# Altium PCB DPPXHK.PcbDoc (part 1 of 3)
Units mm, origin at the board's own origin, x right, y up, seen from the top; angles counter-clockwise.
Board outline 90 x 49 mm, 4 copper layers (Top Layer, ground_plane, source, Bottom Layer), stack 0.778 mm thick; 169 components, 237 nets, 996 pads, 341 vias.
Unrouted connection lines stored in the file: 220.
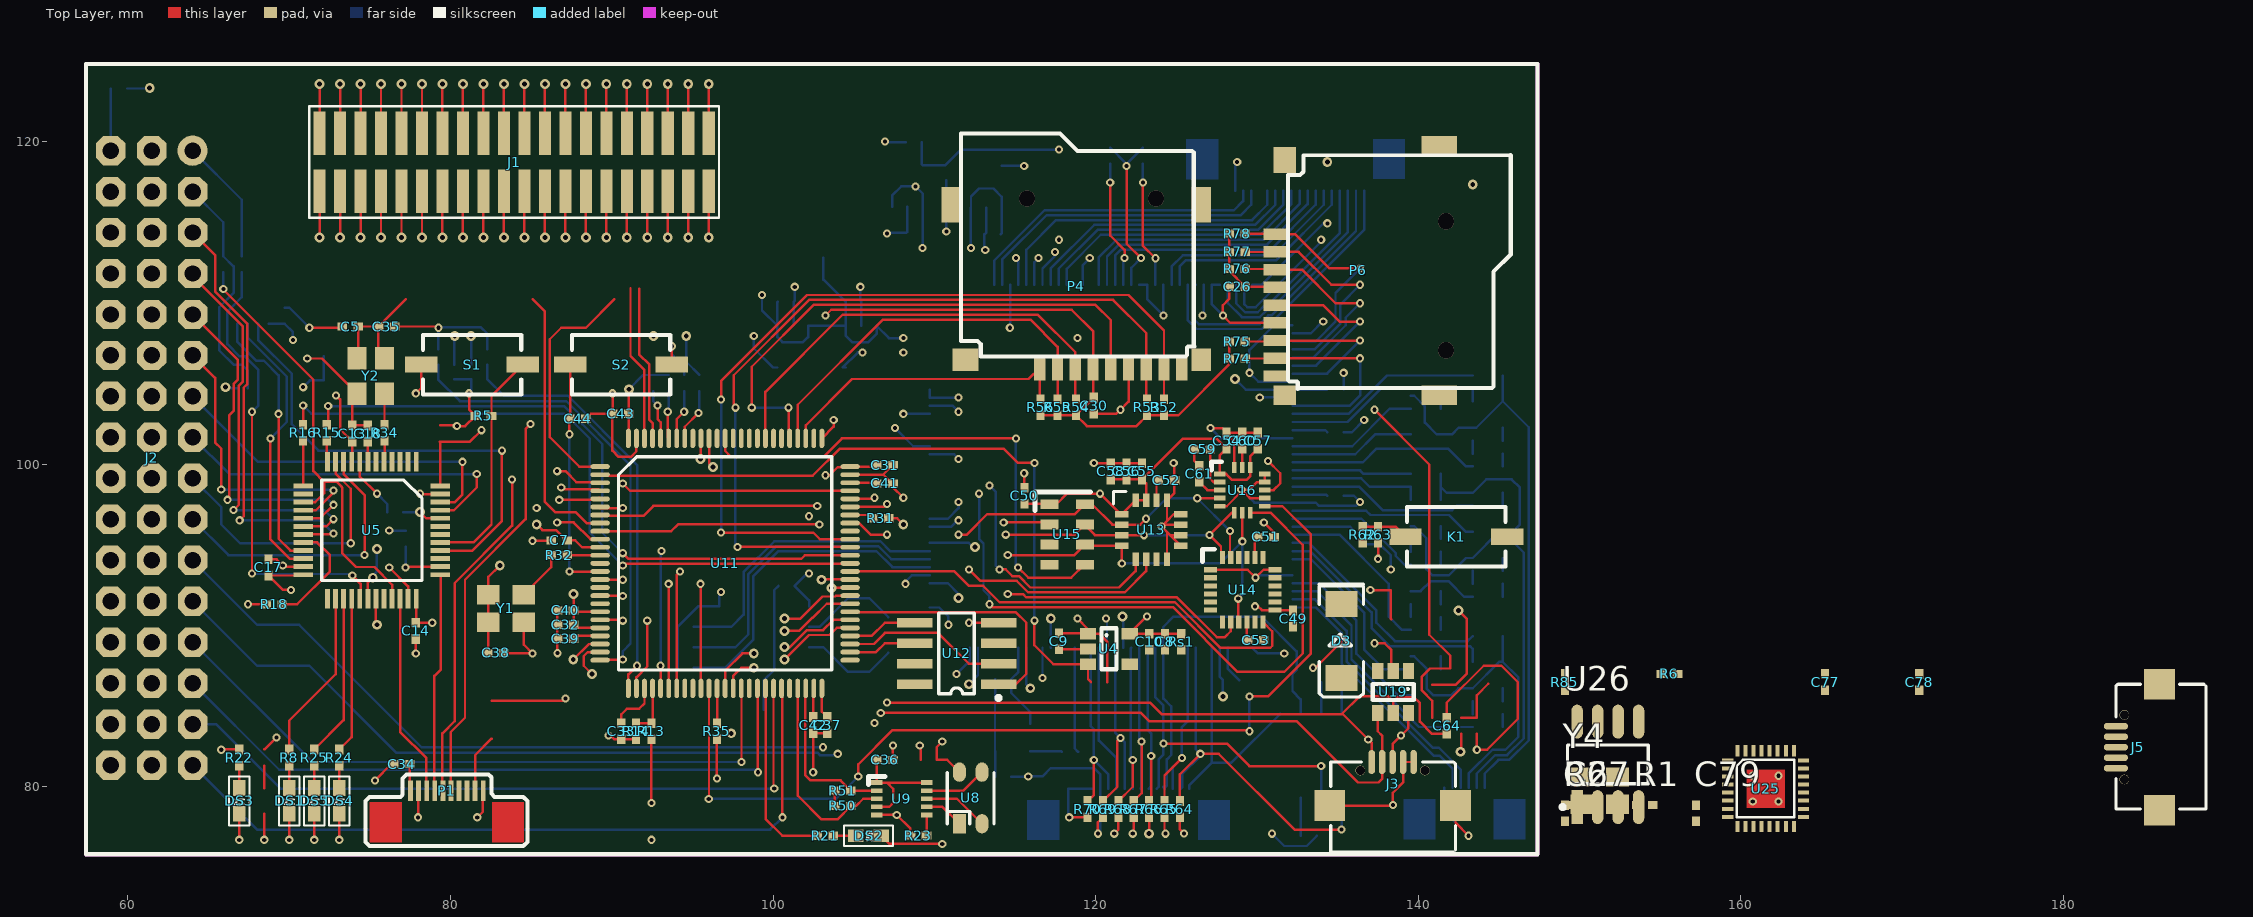
[diagram p0: Top Layer view]
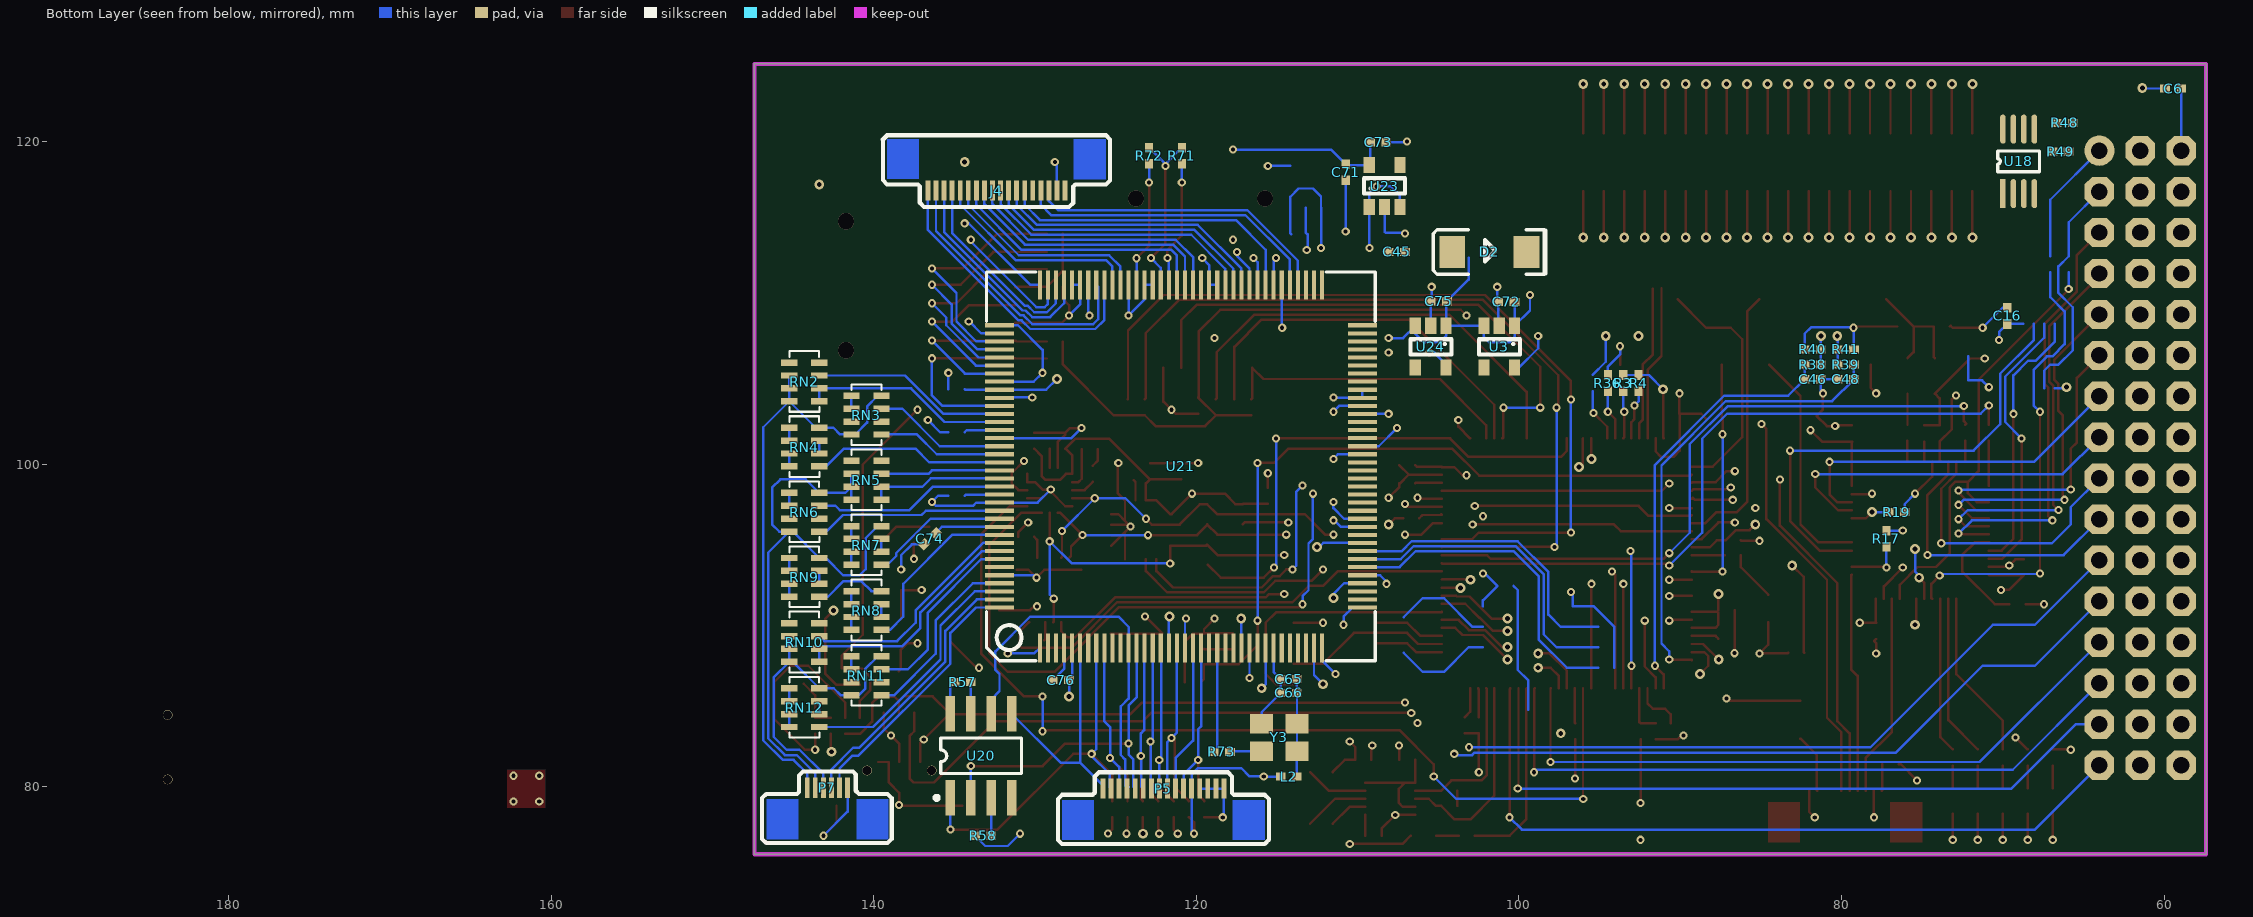
[diagram p1: Bottom Layer view, seen from below]
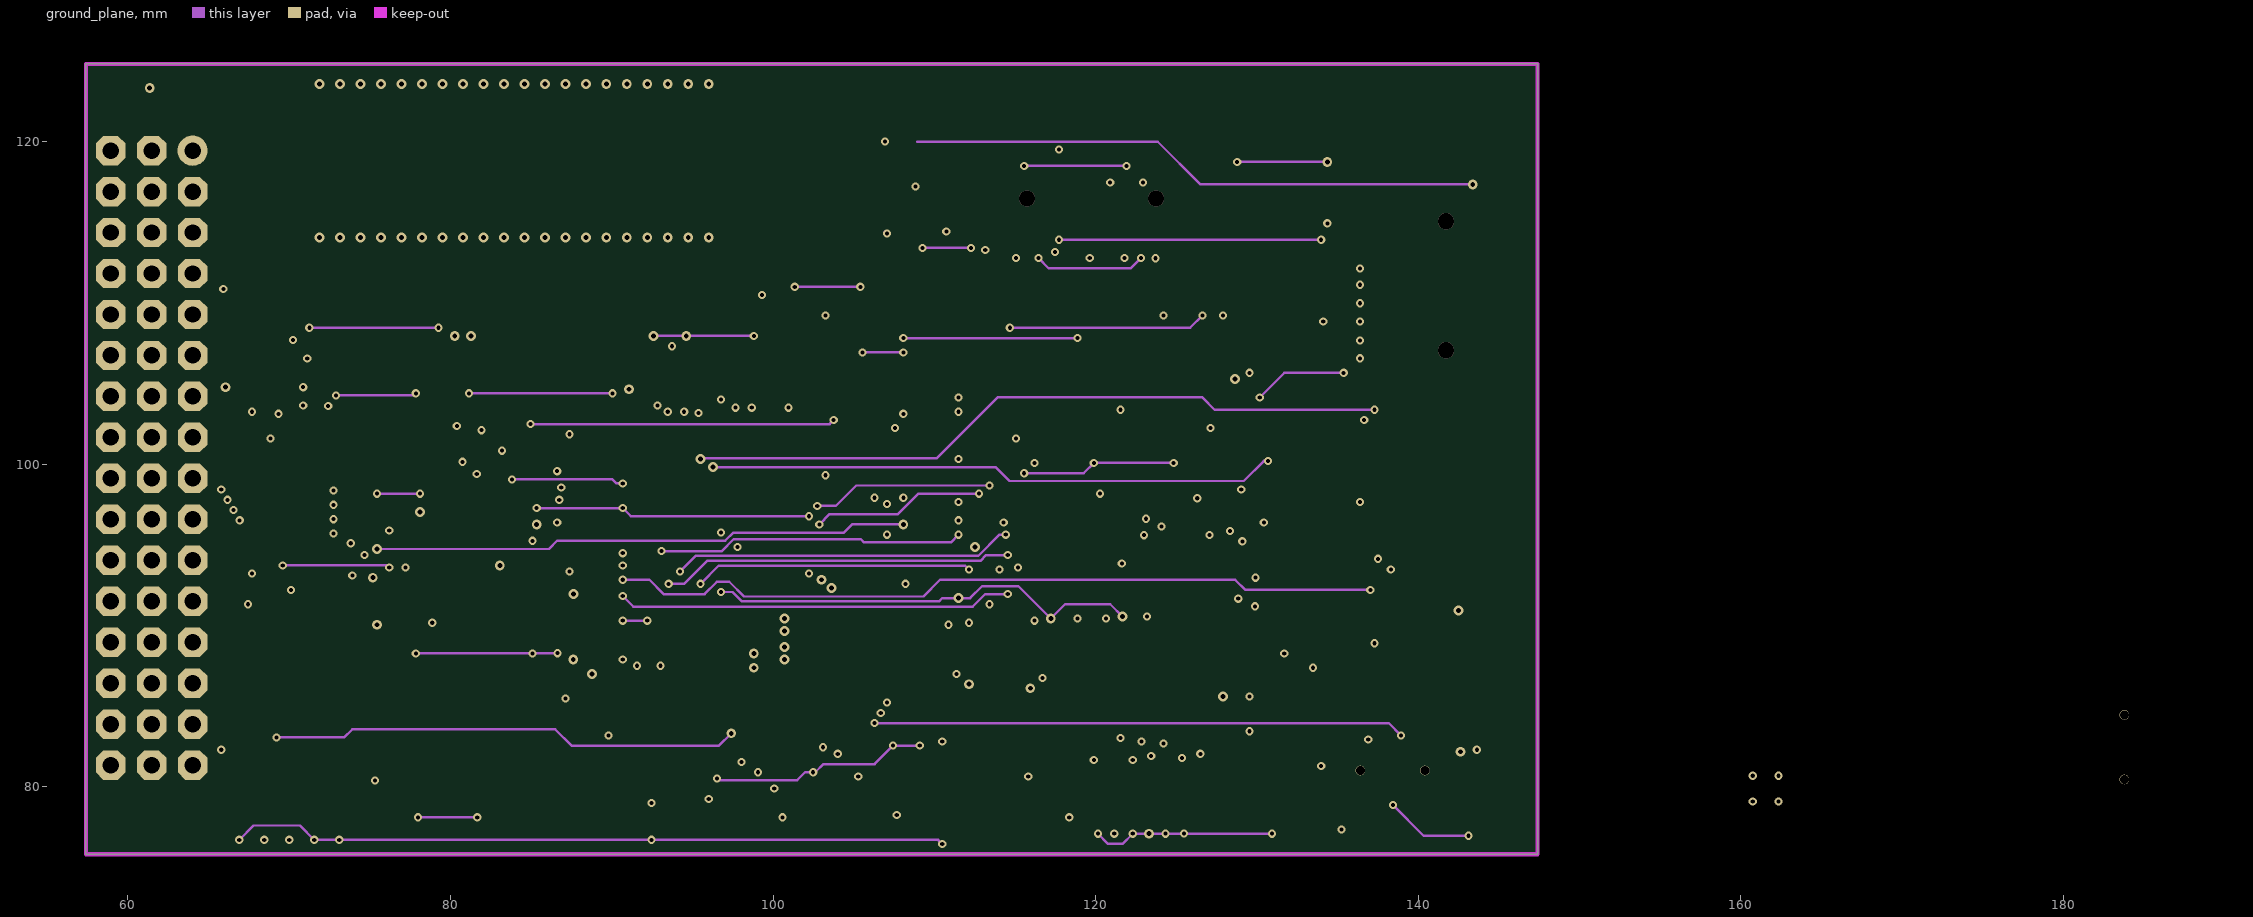
[diagram p2: ground_plane]
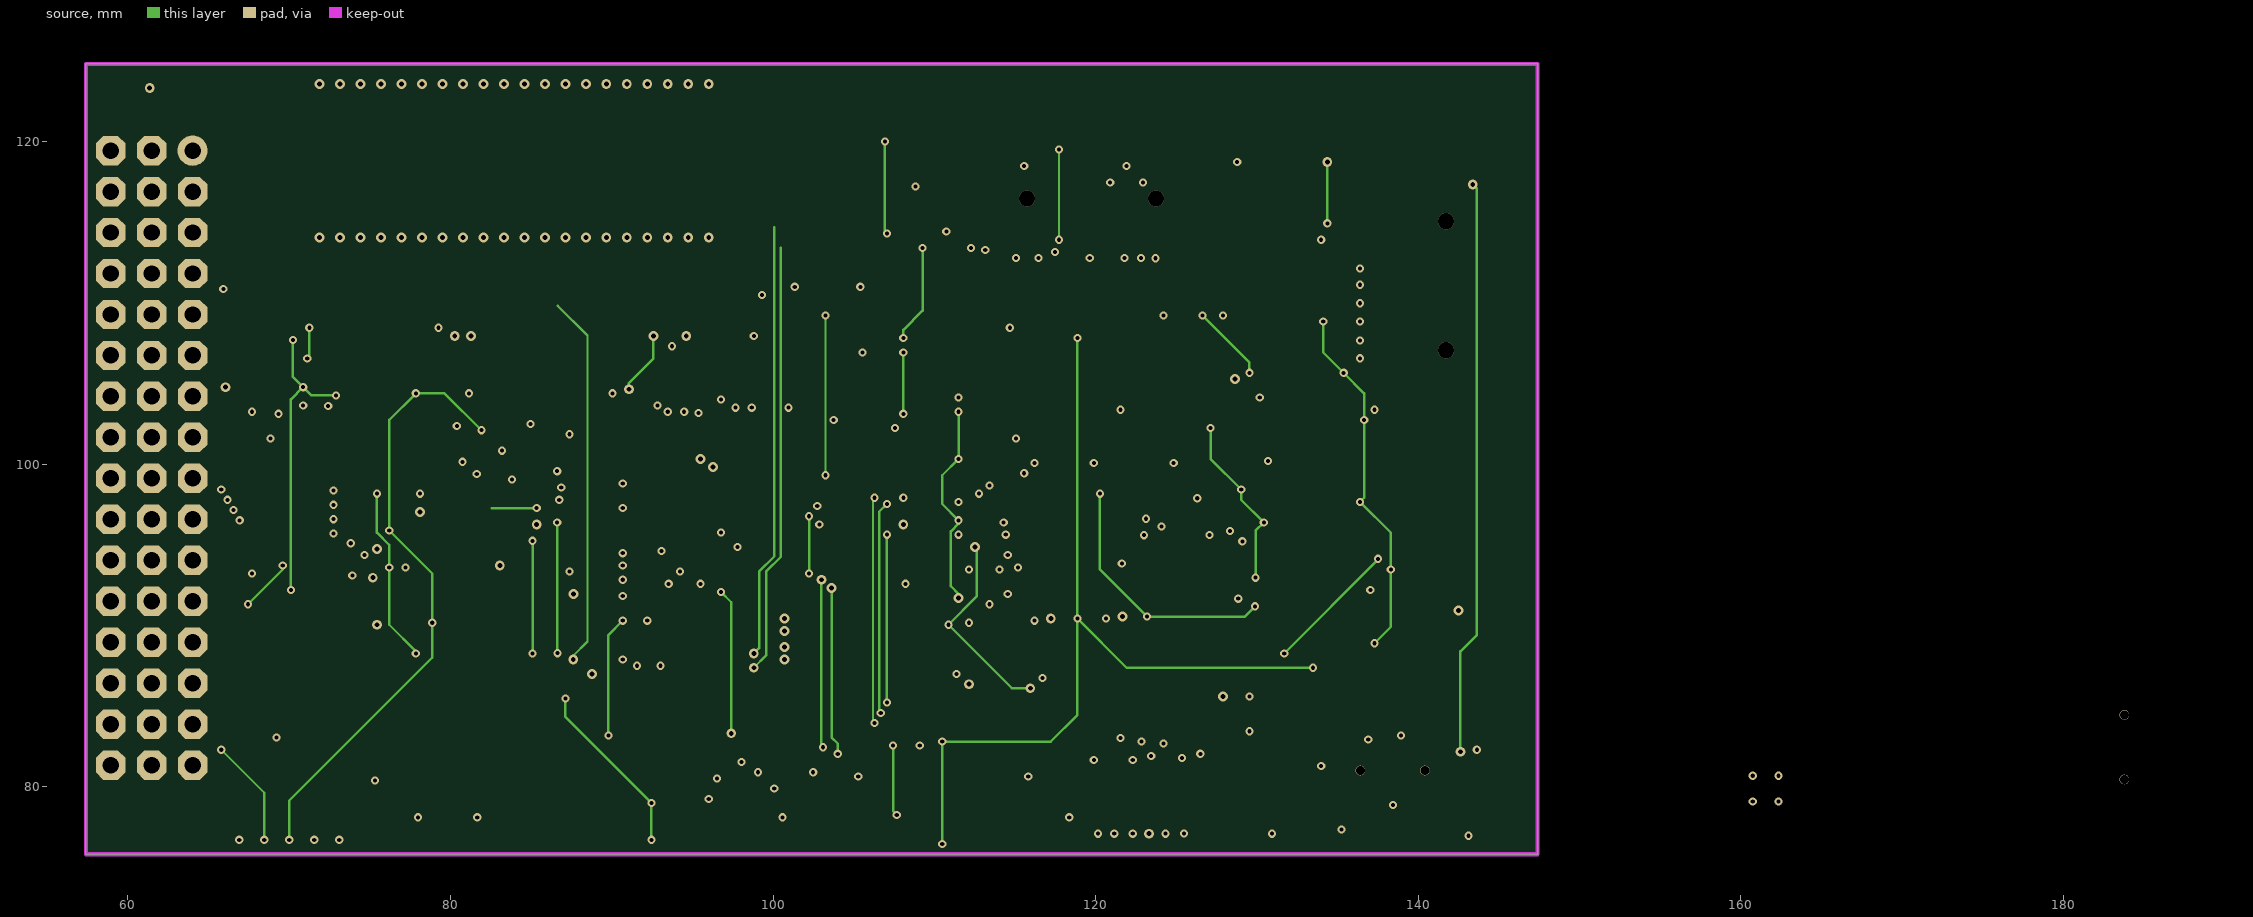
[diagram p3: source]

## Layer stack, top to bottom
Top Solder: solder mask 0.0102, Solder Resist, Dk 3.5
Top Layer: signal copper 0.0356
Dielectric 1: core 0.254, FR-4, Dk 4.2
ground_plane: signal copper 0.036
Dielectric 3: prepreg 0.127, Dk 4.2
source: signal copper 0.036
Dielectric 2: core 0.254, Dk 4.2
Bottom Layer: signal copper 0.0356
Bottom Solder: solder mask 0.0102, Solder Resist, Dk 3.5

## Board outline
57.399,75.814 147.399,75.814 147.399,124.814 57.399,124.814

## Design rules (kind name [scope] priority, off if disabled: settings)
Clearance [All] p1: gap=0.152 ignorepadtopadclearanceinfootprint=FALSE
ComponentClearance [All] p1: gap=0.152 collisioncheckmode=3 verticalgap=0.152 showdistances=FALSE
DiffPairsRouting [All] p1: maxlimit=0.254 minlimit=0.254 mostfreqgap=0.254 toplayer_minwidth=0.381 toplayer_maxwidth=0.381 toplayer_prefwidth=0.381 midlayer1_minwidth=0.381 midlayer1_maxwidth=0.381 midlayer1_prefwidth=0.381 midlayer2_minwidth=0.381 midlayer2_maxwidth=0.381 midlayer2_prefwidth=0.381 bottomlayer_minwidth=0.381 bottomlayer_maxwidth=0.381 bottomlayer_prefwidth=0.381 maxuncoupledlength=12.7
HoleSize [All] p1: absolutevalues=TRUE maxlimit=0.356 minlimit=0.305 maxpercent=80.000 minpercent=20.000
PolygonConnect [All] p1: connectstyle=Relief reliefconductorwidth=0.254 reliefentries=4 polygonreliefangle="90 Angle" airgapwidth=0.254
RoomDefinition DPPXHK_USB_SD_DEBUG [InComponentClass('DPPXHK_USB_SD_DEBUG')] p1: confinementstyle=ConfineIn formatcopy=TRUE lockcomponents=FALSE outline 0,0 50.8,0 50.8,25.4 0,25.4
RoomDefinition DPPXHK_SERVO [InComponentClass('DPPXHK_SERVO')] p2: confinementstyle=ConfineIn formatcopy=TRUE lockcomponents=FALSE outline 0,0 50.8,0 50.8,25.4 0,25.4
RoomDefinition DPPXHK_SENSOR [InComponentClass('DPPXHK_SENSOR')] p3: confinementstyle=ConfineIn formatcopy=TRUE lockcomponents=FALSE outline 0,0 50.8,0 50.8,25.4 0,25.4
RoomDefinition DPPXHK_POWER_SOURCE [InComponentClass('DPPXHK_POWER_SOURCE')] p4: confinementstyle=ConfineIn formatcopy=TRUE lockcomponents=FALSE outline 0,0 50.8,0 50.8,25.4 0,25.4
RoomDefinition DPPXHK_MCU [InComponentClass('DPPXHK_MCU')] p5: confinementstyle=ConfineIn formatcopy=TRUE lockcomponents=FALSE outline 0,0 50.8,0 50.8,25.4 0,25.4
RoomDefinition DPPXHK_LEDs [InComponentClass('DPPXHK_LEDs')] p6: confinementstyle=ConfineIn formatcopy=TRUE lockcomponents=FALSE outline 0,0 50.8,0 50.8,25.4 0,25.4
RoomDefinition DPPXHK_IO [InComponentClass('DPPXHK_IO')] p7: confinementstyle=ConfineIn formatcopy=TRUE lockcomponents=FALSE outline 0,0 50.8,0 50.8,25.4 0,25.4
RoomDefinition DPPXHK_FMUPOWER [InComponentClass('DPPXHK_FMUPOWER')] p8: confinementstyle=ConfineIn formatcopy=TRUE lockcomponents=FALSE outline 0,0 50.8,0 50.8,25.4 0,25.4
RoomDefinition DPPXHK_FMU_PORTS_CAN [InComponentClass('DPPXHK_FMU_PORTS_CAN')] p9: confinementstyle=ConfineIn formatcopy=TRUE lockcomponents=FALSE outline 0,0 50.8,0 50.8,25.4 0,25.4
RoomDefinition DPPXHK_10CL010_SDRAM [InComponentClass('DPPXHK_10CL010_SDRAM')] p10: confinementstyle=ConfineIn formatcopy=TRUE lockcomponents=FALSE outline 0,0 50.8,0 50.8,25.4 0,25.4
RoomDefinition DPPXHK_10CL010_POWER [InComponentClass('DPPXHK_10CL010_POWER')] p11: confinementstyle=ConfineIn formatcopy=TRUE lockcomponents=FALSE outline 0,0 50.8,0 50.8,25.4 0,25.4
RoomDefinition DPPXHK_10CL010_GRAPHICS [InComponentClass('DPPXHK_10CL010_GRAPHICS')] p12: confinementstyle=ConfineIn formatcopy=TRUE lockcomponents=FALSE outline 0,0 50.8,0 50.8,25.4 0,25.4
RoomDefinition DPPXHK_10CL010_FPGA [InComponentClass('DPPXHK_10CL010_FPGA')] p13: confinementstyle=ConfineIn formatcopy=TRUE lockcomponents=FALSE outline 0,0 50.8,0 50.8,25.4 0,25.4
RoomDefinition DPPXHK_10CL010_DEBUGPORT [InComponentClass('DPPXHK_10CL010_DEBUGPORT')] p14: confinementstyle=ConfineIn formatcopy=TRUE lockcomponents=FALSE outline 0,0 50.8,0 50.8,25.4 0,25.4
RoutingVias [All] p1: holewidth=0.305 width=0.61 viastyle="Through Hole" minholewidth=0.305 minwidth=0.61 maxholewidth=0.305 maxwidth=0.61
SolderMaskExpansion [All] p1: expansion=0.102
Width [All] p1: maxlimit=0.254 minlimit=0.152 preferedwidth=0.152
27 further rules are at their usual default settings.

## Classes and differential pairs
net class VGAD[15..0]: VGAD0 VGAD1 VGAD2 VGAD3 VGAD4 VGAD5 VGAD6 VGAD7 VGAD8 VGAD9 VGAD10 VGAD11 VGAD12 VGAD13 VGAD14 VGAD15
component class DPPXHK_10CL010_SDRAM: C77 C78 C79 J5 R1 R2 R6 R85 U25 U26 U27 Y4
component class DPPXHK_10CL010_DEBUGPORT: K1 P5 P7 R57 R58 R62 R63 U20
component class DPPXHK_FMU_PORTS_CAN: J1 P1 R3 R4 R5
component class DPPXHK_FMUPOWER: C5 C6 C7 C8 C9 C10 F7 F8 R13 R14 U3 U4
component class DPPXHK_IO: C13 C14 C16 C17 C18 R15 R16 R17 R18 R19 U5
component class DPPXHK_LEDs: C26 DS1 DS2 DS3 DS4 DS5 R8 R21 R22 R23 R24 R25 S1 U8 U9
component class DPPXHK_MCU: C30 C31 C32 C33 C34 C35 C36 C37 C38 C39 C40 C41 C42 C43 C44 R31 R32 R34 R35 R36 S2 U11 U12 Y1 Y2
component class DPPXHK_POWER_SOURCE: C45 C46 C48 D2 D3 Q8 Q9 R38 R39 R40 R41
component class DPPXHK_SENSOR: C49 C50 C51 C52 C53 C54 C55 C56 C57 C58 C59 C60 C61 Rs1 U13 U14 U15 U16
component class DPPXHK_SERVO: J2 R48 R49 U18
component class DPPXHK_USB_SD_DEBUG: C64 J3 P4 R50 R51 R52 R53 R54 R55 R56 U19
component class DPPXHK_10CL010_POWER: C67 C71 C72 C73 C74 C75 C76 U23 U24
component class DPPXHK_10CL010_FPGA: C65 C66 L2 R64 R65 R66 R67 R68 R69 R70 R71 R72 R73 U21 Y3
component class DPPXHK_10CL010_GRAPHICS: J4 P6 R74 R75 R76 R77 R78 RN2 RN3 RN4 RN5 RN6 RN7 RN8 RN9 RN10 RN11 RN12
differential pair USB: +USB_P -USB_N

## Components (designator, comment, footprint, x,y, rotation, side; value= is the part's Value field where it differs from the comment)
C5 "106 16V" LC0402 73.787,108.537 r180 top
C6 "104" LC0402 59.444,123.294 r0 bottom
C7 "104" LC0402 86.741,95.27 r0 top
C8 "106 16V" LC0402 124.298,88.987 r270 top
C9 "104" LC0402 117.729,89.027 r90 top
C10 "104" LC0402 123.33,88.987 r90 top
C13 "104" LC0402 73.914,101.903 r90 top
C14 "104" LC0402 77.851,89.662 r270 top
C16 "104" LC0402 69.723,109.198 r90 bottom
C17 "106 10V" LC0402 68.707,93.599 r90 top
C18 "104" LC0402 74.867,101.903 r270 top
C26 "104" LC0402 128.778,110.998 r0 top
C30 "104" LC0402 119.888,103.632 r270 top
C31 "104" LC0402 106.934,99.949 r0 top
C32 "104" LC0402 87.13,90.043 r180 top
C33 "104" LC0402 90.594,83.439 r270 top
C34 "104" LC0402 76.962,81.408 r180 top
C35 "106 10V" LC0402 76.031,108.537 r0 top
C36 "106 10V" LC0402 106.934,81.661 r0 top
C37 "104" LC0402 103.355,83.82 r90 top value=0.1uF
C38 "105" LC0402 82.804,88.3 r180 top
C39 "106 10V" LC0402 87.13,89.177 r0 top
C40 "104" LC0402 87.13,90.932 r0 top
C41 "2.2uF" LC0402 106.934,98.806 r0 top
C42 "2.2uF" LC0402 102.489,83.82 r270 top
C43 "104" LC0402 90.551,103.124 r0 top
C44 "104" LC0402 87.884,102.811 r180 top
C45 "106 16v" LC0402 107.569,113.157 r180 bottom
C46 "104" LC0402 81.788,105.263 r0 bottom
C48 "104" LC0402 79.727,105.263 r180 bottom
C49 "104" LC0402 132.239,90.432 r90 top
C50 "10uF 10V" LC0402 115.588,98.044 r270 top
C51 "10n" LC0402 130.556,95.487 r180 top
C52 "10n" LC0402 124.387,99.011 r180 top
C53 "2.2uF" LC0402 129.921,89.094 r180 top
C54 "104" LC0402 128.122,101.461 r270 top
C55 "2.2uF" LC0402 122.875,99.556 r270 top
C56 "104" LC0402 121.907,99.556 r270 top
C57 "104" LC0402 130.056,101.461 r270 top
C58 "10u 10V" LC0402 120.94,99.556 r270 top
C59 "105" LC0402 126.609,100.916 r0 top
C60 "10u 10V" LC0402 129.089,101.461 r270 top
C61 "105" LC0402 126.423,99.404 r90 top
C64 "106 16v" LC0402 141.774,83.779 r90 top
C65 "104" LC0402 114.268,86.679 r180 bottom value=0.1uF
C66 "105" LC0402 114.268,85.813 r180 bottom value=4.7uf
C67 "106 16V" LC0402 149.098,78.359 r90 top
C71 "106 16V" LC0402 110.744,118.102 r270 bottom
C72 "104" LC0402 100.777,110.059 r180 bottom
C73 "104" LC0402 108.725,119.967 r0 bottom
C74 "106 16V" LC0402 136.525,95.377 r315 bottom
C75 "104" LC0402 104.963,110.109 r180 bottom
C76 "104" LC0402 128.397,86.614 r180 bottom
C77 "104" LC0402 165.227,86.487 r90 top value=0.1uF
C78 "105" LC0402 171.069,86.487 r90 top
C79 "106 16v" LC0402 157.226,78.359 r90 top
D2 "1N5822" SMA 104.14,113.157 r0 bottom
D3 "1N5822" SMA 135.242,86.738 r270 top locked
DS1 "LED3" 0603_diode 70.003,79.121 r90 top
DS2 "AMBER LED" 0603_diode 105.918,76.962 r180 top
DS3 "GREEN LED" 0603_diode 66.903,79.121 r90 top
DS4 "AMBER LED" 0603_diode 73.102,79.121 r90 top
DS5 "BLUE LED" 0603_diode 71.552,79.121 r90 top
J1 "36pin" SMD-HEADER-2X20 71.882,116.923 r0 top
J2 "HEADER-3*16" 3X16RA 61.468,100.393 r180 top locked
J3 "440247-1" MCRO_USB 137.115,81.534 r0 top locked
J4 "CAMERA" FPC-0.5-18 128.144,116.967 r0 bottom locked
J5 "440247-1" MCRO_USB 183.261,81.153 r90 top
K1 "RESET" BUTTON-3*6 142.367,95.504 r0 top
L2 "10K" 0402R 114.268,80.626 r0 bottom value=600ohm
P1 "FMU/IO_SW" FPC-0.5-10 77.526,79.756 r0 top
P4 "TF card" TF-2 118.791,111.028 r90 top locked
P5 "DEBUG_FPC" FPC-0.5-16 125.793,79.883 r180 bottom locked
P6 "TF card" TF-2 136.271,112.014 r0 top locked
P7 "VGA_PORT" FPC-0.5-6 144.129,79.935 r180 bottom locked
R1 "10K" 0402R 154.051,78.867 r0 top value=820
R2 "10K" 0402R 149.733,78.867 r0 top value=22
R3 "2k" 0402R 93.532,105.029 r270 bottom
R4 "2k" 0402R 92.58,105.029 r270 bottom
R5 "2k" 0402R 82.042,102.997 r0 top
R6 "10K" 0402R 155.575,86.995 r0 top value=12K
R8 "500R" 0402R 70.003,81.811 r270 top
R13 "10k" 0402R 92.456,83.439 r90 top
R14 "10k" 0402R 91.503,83.439 r270 top
R15 "220" 0402R 72.327,101.951 r90 top
R16 "220" 0402R 70.866,101.951 r90 top
R17 "10k" 0402R 77.216,95.377 r90 bottom
R18 "10k" 0402R 69.071,91.313 r0 top
R19 "10k" 0402R 76.581,97.028 r0 bottom
R21 "470" 0402R 103.228,76.962 r0 top
R22 "220" 0402R 66.903,81.811 r270 top
R23 "10k" 0402R 109.018,76.97 r0 top
R24 "470" 0402R 73.102,81.811 r270 top
R25 "220" 0402R 71.552,81.811 r270 top
R31 "470R" 0402R 106.68,96.647 r180 top
R32 "33R" 0402R 86.741,94.361 r0 top value=33
R34 "33R" 0402R 75.915,101.951 r270 top value=33
R35 "10k" 0402R 96.52,83.447 r90 top
R36 "10k" 0402R 94.485,105.029 r270 bottom
R38 "10k 1%" 0402R 81.78,106.172 r0 bottom
R39 "10k 1%" 0402R 79.727,106.172 r180 bottom
R40 "1M" 0402R 81.788,107.125 r180 bottom
R41 "1M" 0402R 79.727,107.125 r0 bottom
R48 "220R" 0402R 66.167,121.158 r0 bottom
R49 "100k" 0402R 66.421,119.38 r180 bottom
R50 "2k" 0402R 104.319,78.811 r180 top
R51 "2k" 0402R 104.311,79.764 r180 top
R52 "100k" 0402R 124.252,103.535 r270 top
R53 "100k" 0402R 123.198,103.535 r270 top
R54 "100k" 0402R 118.791,103.535 r270 top
R55 "100k" 0402R 117.648,103.535 r270 top
R56 "100k" 0402R 116.594,103.535 r270 top
R57 "10K" 0402R 134.493,86.487 r0 bottom
R58 "10K" 0402R 133.223,76.962 r180 bottom
R62 "10k" 0402R 136.563,95.631 r90 top
R63 "100" 0402R 137.516,95.631 r90 top
R64 "10K" 0402R 125.223,78.613 r90 top
R65 "10K" 0402R 124.27,78.613 r90 top
R66 "10K" 0402R 123.318,78.613 r90 top
R67 "10K" 0402R 122.365,78.613 r90 top
R68 "10K" 0402R 121.412,78.613 r90 top value=1K
R69 "10K" 0402R 120.46,78.613 r90 top
R70 "10K" 0402R 119.507,78.613 r90 top
R71 "10K" 0402R 120.904,119.126 r270 bottom
R72 "10K" 0402R 122.936,119.126 r270 bottom
R73 "10K" 0402R 118.416,82.165 r0 bottom value=33
R74 "100k" 0402R 128.778,106.553 r180 top
R75 "100k" 0402R 128.778,107.607 r180 top
R76 "100k" 0402R 128.778,112.103 r180 top
R77 "100k" 0402R 128.778,113.157 r180 top
R78 "100k" 0402R 128.778,114.3 r180 top
R85 "33R" 0402R 149.098,86.487 r90 top value=33
RN2 "1K" RN-8P 145.241,106.3 r180 bottom
RN3 "2K" RN-8P 141.392,104.242 r180 bottom
RN4 "2K" RN-8P 145.241,102.261 r180 bottom
RN5 "1K" RN-8P 141.392,100.204 r180 bottom
RN6 "2K" RN-8P 145.241,98.223 r180 bottom
RN7 "2K" RN-8P 141.392,96.165 r180 bottom
RN8 "2K" RN-8P 141.392,92.126 r180 bottom
RN9 "2K" RN-8P 145.241,94.184 r180 bottom
RN10 "1K" RN-8P 145.241,90.145 r180 bottom
RN11 "2K" RN-8P 141.392,88.087 r180 bottom
RN12 "2K" RN-8P 145.241,86.106 r180 bottom
Rs1 "220R" 0402R 125.309,88.987 r90 top
S1 "SW-PB" BUTTON-3*6 81.336,106.172 r180 top
S2 "SW-PB" BUTTON-3*6 90.576,106.172 r0 top
U3 "SPX3819" SOT-23-5 100.269,108.585 r0 bottom
U4 "SPX3819" SOT-23-5 119.528,89.495 r270 top
U5 "F100" LQFP48_ST 77.875,100.147 r270 top locked
U8 "*" LEDRGB 111.555,77.707 r90 top
U9 "TCA62724" SON10 106.426,80.256 r0 top
U11 "MMCU" LQFP100st 89.278,99.85 r0 top locked
U12 "FM25V01" SO-g8 111.379,88.265 r90 top
U13 "L3GD20" LGA_16 121.751,96.903 r0 top
U14 "MPU-6000" MPU_FP 127.127,93.456 r0 top
U15 "MS5611-01BA" MS5611-01 117.136,97.516 r0 top
U16 "LSM303D LGA16" LGA_3_3_16L 127.692,99.393 r0 top
U18 "74LVC2G240" TSSOP_8 69.992,116.777 r90 bottom
U19 "SRV05" SOT23-6 139.396,87.172 r180 top
U20 "EPCS16" SO-g8 133.35,81.915 r180 bottom
U21 "cyclone 10 10CL010" LQFP144 129.706,88.624 r90 bottom locked
U23 "SPX3819M5-L-2.5" SOT-23-5 109.281,115.951 r180 bottom
U24 "SPX3819M5-L-1.2" SOT-23-5 104.521,108.585 r0 bottom
U25 "USB3300" QFN-32 161.544,79.883 r0 top
U26 "MIC2075" SOIC-8 149.86,78.74 r0 top
Y1 "24M 3.3V" OSCILLATOR-3.2X2.5 83.439,91.059 r0 top
Y2 "24M 3.3V" OSCILLATOR-3.2X2.5 75.057,105.478 r270 top
Y3 "50M 3.3V" OSCILLATOR-3.2X2.5 114.86,83.054 r0 bottom
Y4 "24M 3.3V" OSCILLATOR-3.2X2.5 151.257,79.756 r0 top

## Footprints (in the part's own frame and the unit in brackets; to place one, negate y for a bottom-side part, rotate by r counter-clockwise, add the part's x,y. Pads: shape width x height; smd on the part's side, far side on the other; paste and mask are expansions set on the pad)
3X16RA [mil] "3X16RA"
  round 74 hole 40: 1(-100,-750)
  oct 71.65x71.65 hole 40: 2(0,-750) 3(100,-750) 4(-100,-650) 5(0,-650) 6(100,-650) 7(-100,-550) 8(0,-550) 9(100,-550) 10(-100,-450) 11(0,-450) 12(100,-450) 13(-100,-350) 14(0,-350) 15(100,-350) 16(-100,-250) 17(0,-250) 18(100,-250) 19(-100,-150) 20(0,-150) 21(100,-150) 22(-100,-50) 23(0,-50) 24(100,-50) 25(-100,50) 26(0,50) 27(100,50) 28(-100,150) 29(0,150) 30(100,150) 31(-100,250) 32(0,250) 33(100,250) 34(-100,350) 35(0,350) 36(100,350) 37(-100,450) 38(0,450) 39(100,450) 40(-100,550) 41(0,550) 42(100,550) 43(-100,650) 44(0,650) 45(100,650) 46(-100,750) 47(0,750) 48(100,750)
0402R [mm] "Chip Capacitor, Body 1.0x0.5mm, IPC High Density"
  rect 0.6x0.5 smd: 1(-0.5,0) 2(0.5,0)
  body extent -0.55,-0.3 0.55,0.3, height 1.3
0603_diode [mil]
  rect 38x31 smd: 1(-31.5,0) 2(31.5,0)
  silkscreen extent -60,-25 60,25
BUTTON-3*6 [mm]
  rect 2x1 smd: 1(-3.15,0) 2(3.15,0)
  silkscreen extent -3.05,-1.85 3.05,1.85
FPC-0.5-6 [mm]
  rect 0.3x1.25 smd: 1(0,0) 2(0.5,0) 3(1,0) 4(1.5,0) 5(2,0) 6(2.5,0)
  Top Layer region: -2.54,-0.7 -0.54,-0.7 -0.54,-3.2 -2.54,-3.2
  Top Layer region: 3.04,-0.7 5.04,-0.7 5.04,-3.2 3.04,-3.2
  silkscreen extent -2.79,-3.43 5.24,1.02
FPC-0.5-10 [mm]
  rect 0.3x1.25 smd: 1(0,0) 2(0.5,0) 3(1,0) 4(1.5,0) 5(2,0) 6(2.5,0) 7(3,0) 8(3.5,0) 9(4,0) 10(4.5,0)
  Top Layer region: -2.54,-3.2 -0.54,-3.2 -0.54,-0.7 -2.54,-0.7
  Top Layer region: 5.04,-3.2 7.04,-3.2 7.04,-0.7 5.04,-0.7
  silkscreen extent -2.79,-3.43 7.24,1.02
FPC-0.5-16 [mm]
  rect 0.3x1.25 smd: 1(0,0) 2(0.5,0) 3(1,0) 4(1.5,0) 5(2,0) 6(2.5,0) 7(3,0) 8(3.5,0) 9(4,0) 10(4.5,0) 11(5,0) 12(5.5,0) 13(6,0) 14(6.5,0) 15(7,0) 16(7.5,0)
  Top Layer region: 8.04,-0.7 10.04,-0.7 10.04,-3.2 8.04,-3.2
  Top Layer region: -2.54,-0.7 -0.54,-0.7 -0.54,-3.2 -2.54,-3.2
  silkscreen extent -2.79,-3.43 10.3,1.02
FPC-0.5-18 [mm]
  rect 0.3x1.25 smd: 1(0,0) 2(0.5,0) 3(1,0) 4(1.5,0) 5(2,0) 6(2.5,0) 7(3,0) 8(3.5,0) 9(4,0) 10(4.5,0) 11(5,0) 12(5.5,0) 13(6,0) 14(6.5,0) 15(7,0) 16(7.5,0) 17(8,0) 18(8.5,0)
  Top Layer region: 9.04,-0.702 11.04,-0.702 11.04,-3.202 9.04,-3.202
  Top Layer region: -2.538,-0.7 -0.538,-0.7 -0.538,-3.2 -2.538,-3.2
  silkscreen extent -2.79,-3.43 11.3,1.02
LC0402 [mm]
  rect 0.6x0.51 smd: 1(-0.5,0) 2(0.5,0)
LEDRGB [mm]
  rect 1.2x0.8 smd: 1(0,0)
  oval 1.2x0.8 smd: 2(0,-1.4) 3(3.2,-1.4) 4(3.2,0)
  silkscreen extent 0,-2.15 3.17,0.75
LGA_3_3_16L [mm]
  rect 0.7x0.3 smd: 1(0,0) 2(0,-0.5) 3(0,-1) 4(0,-1.5) 5(0,-2) 9(2.8,-2) 10(2.8,-1.5) 11(2.8,-1) 12(2.8,-0.5) 13(2.8,0)
  rect 0.3x0.7 smd: 6(0.9,-2.4) 7(1.4,-2.4) 8(1.9,-2.4) 14(1.9,0.4) 15(1.4,0.4) 16(0.9,0.4)
  silkscreen extent -0.51,0.25 0.13,0.76
LGA_16 [mm]
  rect 0.85x0.4 smd: 1(-0.125,0) 2(-0.125,-0.65) 3(-0.125,-1.3) 4(-0.125,-1.95) 9(3.525,-1.95) 10(3.525,-1.3) 11(3.525,-0.65) 12(3.525,0)
  rect 0.4x0.85 smd: 5(0.725,-2.8) 6(1.375,-2.8) 7(2.025,-2.8) 8(2.675,-2.8) 13(2.675,0.855) 14(2.025,0.855) 15(1.375,0.855) 16(0.725,0.855)
  silkscreen extent -0.64,0.64 0.13,1.4
LQFP48_ST [mm]
  rect 1.2x0.3 smd: 1(0,0) 2(0,-0.5) 3(0,-1) 4(0,-1.5) 5(0,-2) 6(0,-2.5) 7(0,-3) 8(0,-3.5) 9(0,-4) 10(0,-4.5) 11(0,-5) 12(0,-5.5) 25(8.5,-5.5) 26(8.5,-5) 27(8.5,-4.5) 28(8.5,-4) 29(8.5,-3.5) 30(8.5,-3) 31(8.5,-2.5) 32(8.5,-2) 33(8.5,-1.5) 34(8.5,-1) 35(8.5,-0.5) 36(8.5,0)
  rect 0.3x1.2 smd: 13(1.5,-7) 14(2,-7) 15(2.5,-7) 16(3,-7) 17(3.5,-7) 18(4,-7) 19(4.5,-7) 20(5,-7) 21(5.5,-7) 22(6,-7) 23(6.5,-7) 24(7,-7) 37(7,1.5) 38(6.5,1.5) 39(6,1.5) 40(5.5,1.5) 41(5,1.5) 42(4.5,1.5) 43(4,1.5) 44(3.5,1.5) 45(3,1.5) 46(2.5,1.5) 47(2,1.5) 48(1.5,1.5)
  silkscreen extent 1.13,-5.86 7.36,0.37
LQFP100st [mm]
  oval 1.2x0.3 smd: 1(0,0) 2(0,-0.5) 3(0,-1) 4(0,-1.5) 5(0,-2) 6(0,-2.5) 7(0,-3) 8(0,-3.5) 9(0,-4) 10(0,-4.5) 11(0,-5) 12(0,-5.5) 13(0,-6) 14(0,-6.5) 15(0,-7) 16(0,-7.5) 17(0,-8) 18(0,-8.5) 19(0,-9) 20(0,-9.5) 21(0,-10) 22(0,-10.5) 23(0,-11) 24(0,-11.5) 25(0,-12) 51(15.5,-12) 52(15.5,-11.5) 53(15.5,-11) 54(15.5,-10.5) 55(15.5,-10) 56(15.5,-9.5) 57(15.5,-9) 58(15.5,-8.5) 59(15.5,-8) 60(15.5,-7.5) 61(15.5,-7) 62(15.5,-6.5) 63(15.5,-6) 64(15.5,-5.5) 65(15.5,-5) 66(15.5,-4.5) 67(15.5,-4) 68(15.5,-3.5) 69(15.5,-3) 70(15.5,-2.5) 71(15.5,-2) 72(15.5,-1.5) 73(15.5,-1) 74(15.5,-0.5) 75(15.5,0)
  oval 0.3x1.2 smd: 26(1.75,-13.75) 27(2.25,-13.75) 28(2.75,-13.75) 29(3.25,-13.75) 30(3.75,-13.75) 31(4.25,-13.75) 32(4.75,-13.75) 33(5.25,-13.75) 34(5.75,-13.75) 35(6.25,-13.75) 36(6.75,-13.75) 37(7.25,-13.75) 38(7.75,-13.75) 39(8.25,-13.75) 40(8.75,-13.75) 41(9.25,-13.75) 42(9.75,-13.75) 43(10.25,-13.75) 44(10.75,-13.75) 45(11.25,-13.75) 46(11.75,-13.75) 47(12.25,-13.75) 48(12.75,-13.75) 49(13.25,-13.75) 50(13.75,-13.75) 76(13.75,1.75) 77(13.25,1.75) 78(12.75,1.75) 79(12.25,1.75) 80(11.75,1.75) 81(11.25,1.75) 82(10.75,1.75) 83(10.25,1.75) 84(9.75,1.75) 85(9.25,1.75) 86(8.75,1.75) 87(8.25,1.75) 88(7.75,1.75) 89(7.25,1.75) 90(6.75,1.75) 91(6.25,1.75) 92(5.75,1.75) 93(5.25,1.75) 94(4.75,1.75) 95(4.25,1.75) 96(3.75,1.75) 97(3.25,1.75) 98(2.75,1.75) 99(2.25,1.75) 100(1.75,1.75)
  silkscreen extent 1.13,-12.61 14.36,0.62
LQFP144 [mm]
  rect 1.8x0.254 smd: 1(-0.009,0.001) 2(-0.009,-0.499) 3(-0.009,-0.999) 4(-0.009,-1.499) 5(-0.009,-1.999) 6(-0.009,-2.499) 7(-0.009,-2.999) 8(-0.009,-3.499) 9(-0.009,-3.999) 10(-0.009,-4.499) 11(-0.009,-4.999) 12(-0.009,-5.499) 13(-0.009,-5.999) 14(-0.009,-6.499) 15(-0.009,-6.999) 16(-0.009,-7.499) 17(-0.009,-7.999) 18(-0.009,-8.499) 19(-0.009,-8.999) 20(-0.009,-9.499) 21(-0.009,-9.999) 22(-0.009,-10.499) 23(-0.009,-10.999) 24(-0.009,-11.499) 25(-0.009,-11.999) 26(-0.009,-12.499) 27(-0.009,-12.999) 28(-0.009,-13.499) 29(-0.009,-13.999) 30(-0.009,-14.499) 31(-0.009,-14.999) 32(-0.009,-15.499) 33(-0.009,-15.999) 34(-0.009,-16.499) 35(-0.009,-16.999) 36(-0.009,-17.499) 73(22.491,-17.499) 74(22.491,-16.999) 75(22.491,-16.499) 76(22.491,-15.999) 77(22.491,-15.499) 78(22.491,-14.999) 79(22.491,-14.499) 80(22.491,-13.999) 81(22.491,-13.499) 82(22.491,-12.999) 83(22.491,-12.499) 84(22.491,-11.999) 85(22.491,-11.499) 86(22.491,-10.999) 87(22.491,-10.499) 88(22.491,-9.999) 89(22.491,-9.499) 90(22.491,-8.999) 91(22.491,-8.499) 92(22.491,-7.999) 93(22.491,-7.499) 94(22.491,-6.999) 95(22.491,-6.499) 96(22.491,-5.999) 97(22.491,-5.499) 98(22.491,-4.999) 99(22.491,-4.499) 100(22.491,-3.999) 101(22.491,-3.499) 102(22.491,-2.999) 103(22.491,-2.499) 104(22.491,-1.999) 105(22.491,-1.499) 106(22.491,-0.999) 107(22.491,-0.499) 108(22.491,0.001)
  rect 0.254x1.8 smd: 37(2.491,-19.999) 38(2.991,-19.999) 39(3.491,-19.999) 40(3.991,-19.999) 41(4.491,-19.999) 42(4.991,-19.999) 43(5.491,-19.999) 44(5.991,-19.999) 45(6.491,-19.999) 46(6.991,-19.999) 47(7.491,-19.999) 48(7.991,-19.999) 49(8.491,-19.999) 50(8.991,-19.999) 51(9.491,-19.999) 52(9.991,-19.999) 53(10.491,-19.999) 54(10.991,-19.999) 55(11.491,-19.999) 56(11.991,-19.999) 57(12.491,-19.999) 58(12.991,-19.999) 59(13.491,-19.999) 60(13.991,-19.999) 61(14.491,-19.999) 62(14.991,-19.999) 63(15.491,-19.999) 64(15.991,-19.999) 65(16.491,-19.999) 66(16.991,-19.999) 67(17.491,-19.999) 68(17.991,-19.999) 69(18.491,-19.999) 70(18.991,-19.999) 71(19.491,-19.999) 72(19.991,-19.999) 109(19.991,2.501) 110(19.491,2.501) 111(18.991,2.501) 112(18.491,2.501) 113(17.991,2.501) 114(17.491,2.501) 115(16.991,2.501) 116(16.491,2.501) 117(15.991,2.501) 118(15.491,2.501) 119(14.991,2.501) 120(14.491,2.501) 121(13.991,2.501) 122(13.491,2.501) 123(12.991,2.501) 124(12.491,2.501) 125(11.991,2.501) 126(11.491,2.501) 127(10.991,2.501) 128(10.491,2.501) 129(9.991,2.501) 130(9.491,2.501) 131(8.991,2.501) 132(8.491,2.501) 133(7.991,2.501) 134(7.491,2.501) 135(6.991,2.501) 136(6.491,2.501) 137(5.991,2.501) 138(5.491,2.501) 139(4.991,2.501) 140(4.491,2.501) 141(3.991,2.501) 142(3.491,2.501) 143(2.991,2.501) 144(2.491,2.501)
  silkscreen extent -0.81,-20.8 23.29,3.3
MCRO_USB [mm]
  oval 0.4x1.5 smd: 1(0,0) 2(0.65,0) 3(1.3,0) 4(1.95,0) 5(2.6,0)
  rect 1.9x1.9 smd: 6(-2.6,-2.7) 7(5.2,-2.7)
  round 0.6 hole 0.55: 8(-0.7,-0.525) 9(3.3,-0.525)
  silkscreen extent -2.54,-5.59 5.21,0
MPU_FP [mm]
  rect 0.8x0.32 smd: 1(0,0) 2(0,-0.5) 3(0,-1) 4(0,-1.5) 5(0,-2) 6(0,-2.5) 13(4,-2.5) 14(4,-2) 15(4,-1.5) 16(4,-1) 17(4,-0.5) 18(4,0)
  rect 0.32x0.8 smd: 7(0.75,-3.25) 8(1.25,-3.25) 9(1.75,-3.25) 10(2.25,-3.25) 11(2.75,-3.25) 12(3.25,-3.25) 19(3.25,0.75) 20(2.75,0.75) 21(2.25,0.75) 22(1.75,0.75) 23(1.25,0.75) 24(0.75,0.75)
  silkscreen extent -0.51,0.51 0.25,1.27
MS5611-01 [mm]
  rect 1.1x0.6 smd: 1(0,0) 2(0,-1.25) 3(0,-2.5) 4(0,-3.75) 5(2.2,-3.75) 6(2.2,-2.5) 7(2.2,-1.25) 8(2.2,0)
  silkscreen extent -0.89,-0.38 2.54,0.76
OSCILLATOR-3.2X2.5 [mm] "OSCILLATOR-3.2X2.5"
  rect 1.4x1.2 smd: 1(-1.1,-0.85) 2(1.1,-0.85) 3(1.1,0.85) 4(-1.1,0.85)
QFN-32 [mm]
  rect 0.7x0.25 smd: 1(-2.35,1.75) 2(-2.35,1.25) 3(-2.35,0.75) 4(-2.35,0.25) 5(-2.35,-0.25) 6(-2.35,-0.75) 7(-2.35,-1.25) 8(-2.35,-1.75) 17(2.35,-1.75) 18(2.35,-1.25) 19(2.35,-0.75) 20(2.35,-0.25) 21(2.35,0.25) 22(2.35,0.75) 23(2.35,1.25) 24(2.35,1.75)
  rect 0.25x0.7 smd: 9(-1.75,-2.35) 10(-1.25,-2.35) 11(-0.75,-2.35) 12(-0.25,-2.35) 13(0.25,-2.35) 14(0.75,-2.35) 15(1.25,-2.35) 16(1.75,-2.35) 25(1.75,2.35) 26(1.25,2.35) 27(0.75,2.35) 28(0.25,2.35) 29(-0.25,2.35) 30(-0.75,2.35) 31(-1.25,2.35) 32(-1.75,2.35)
  Top Layer region: -1.2,-1.2 1.2,-1.2 1.2,1.2 -1.2,1.2
  silkscreen extent -1.78,-1.78 1.78,1.78
RN-8P [mm]
  rect 1x0.4 smd: 1(0,0) 2(0,-0.8) 3(0,-1.6) 4(0,-2.4) 5(1.858,-2.4) 6(1.858,-1.6) 7(1.858,-0.8) 8(1.858,0)
  silkscreen extent 0,-3.05 1.88,0.71
SMA [mm]
  rect 1.6x2 smd: 1(0,0) 2(-4.6,0)
  silkscreen extent -5.82,-1.37 1.17,1.37
SMD-HEADER-2X20 [mm]
  rect 0.75x2.7 smd: 1(0,0) 2(0,3.6) 3(1.27,0) 4(1.27,3.6) 5(2.54,0) 6(2.54,3.6) 7(3.81,0) 8(3.81,3.6) 9(5.08,0) 10(5.08,3.6) 11(6.35,0) 12(6.35,3.6) 13(7.62,0) 14(7.62,3.6) 15(8.89,0) 16(8.89,3.6) 17(10.16,0) 18(10.16,3.6) 19(11.43,0) 20(11.43,3.6) 21(12.7,0) 22(12.7,3.6) 23(13.97,0) 24(13.97,3.6) 25(15.24,0) 26(15.24,3.6) 27(16.51,0) 28(16.51,3.6) 29(17.78,0) 30(17.78,3.6) 31(19.05,0) 32(19.05,3.6) 33(20.32,0) 34(20.32,3.6) 35(21.59,0) 36(21.59,3.6) 37(22.86,0) 38(22.86,3.6) 39(24.13,0) 40(24.13,3.6)
  silkscreen extent -0.64,-1.65 24.77,5.26
SO-g8 [mm]
  rect 0.6x2.2 smd: 1(-1.905,-2.6) 2(-0.635,-2.6) 3(0.635,-2.6) 4(1.905,-2.6) 5(1.905,2.6) 6(0.635,2.6) 7(-0.635,2.6) 8(-1.905,2.6)
  silkscreen extent -2.88,-2.72 2.5,1.1
SOIC-8 [mm]
  rect 0.7x2.1 smd: 1(0,0)
  oval 0.7x2.1 smd: 2(1.27,0) 3(2.54,0) 4(3.81,0) 5(3.81,5.3) 6(2.54,5.3) 7(1.27,5.3) 8(0,5.3)
  silkscreen extent -1.02,-0.12 4.41,3.85
SON10 [mm]
  rect 0.7x0.3 smd: 1(0,0) 2(0,-0.5) 3(0,-1) 4(0,-1.5) 5(0,-2) 6(3.1,-2) 7(3.1,-1.5) 8(3.1,-1) 9(3.1,-0.5) 10(3.1,0)
  silkscreen extent -0.51,-0.13 0.51,0.38
SOT23-6 [mm]
  rect 0.7x1 smd: 1(0,0) 2(0.95,0) 3(1.9,0) 4(1.9,2.59) 5(0.95,2.59) 6(0,2.59)
  silkscreen extent -0.33,0.81 2.21,1.8
SOT-23-5 [mm]
  rect 0.7x1 smd: 1(0,0) 2(0.95,0) 3(1.9,0) 4(1.9,2.59) 5(0,2.59)
  silkscreen extent -0.33,0.84 2.21,1.78
TF-2 [mm]
  rect 1.4x1.6 smd: 0(-4.55,6.85)
  rect 1.4x1.2 smd: 0(-4.55,-7.75)
  rect 2.2x1.2 smd: 0(5.05,7.75) 0(5.05,-7.75)
  rect 1.6x0.7 smd: 1(-5.05,2.25) 2(-5.05,1.15) 3(-5.05,0.05) 4(-5.05,-1.05) 5(-5.05,-2.15) 6(-5.05,-3.25) 7(-5.05,-4.35) 8(-5.05,-5.45) sd(-5.05,-6.55)
  silkscreen extent -4.35,-7.34 9.47,7.15
TSSOP_8 [mm]
  rect 1.8x0.35 smd: 1(0,0)
  oval 1.8x0.35 smd: 2(0,-0.65) 3(0,-1.3) 4(0,-1.95) 5(4,-1.95) 6(4,-1.3) 7(4,-0.65) 8(4,0)
  silkscreen extent 1.35,-2.28 2.65,0.33

## Part data
C5 C8 C45 C64 C67 C71 C74 C79: library part "Cap Pol3", "Polarized Capacitor (Surface Mount)", LatestRevisionDate=17-Jul-2002, LatestRevisionNote="Re-released for DXP Platform.", PackageReference=C0805, Published=8-Jun-2000, Publisher="Altium Limited"
C6 C7 C9 C10 C13 C14 C16 C17 C18 C26 C30 C31 C32 C33 C34 C35 C36 C37 C38 C39 C40 C41 C42 C43 C44 C49 C50 C51 C52 C53 C54 C55 C56 C57 C58 C59 C60 C61 C65 C66 C72 C73 C75 C76 C77 C78: library part "Cap Semi", "Capacitor (Semiconductor SIM Model)", Published=8-Jun-2000, Publisher="Altium Limited"
  C6 C7 C9 C10 C13 C14 C16 C17 C18 C26 C30 C31 C32 C33 C34 C35 C36 C39 C40 C41 C42 C43 C44 C49 C50 C51 C52 C53 C54 C55 C56 C57 C58 C59 C60 C61 C72 C73 C75 C76: LatestRevisionDate=17-Jul-2002, LatestRevisionNote="Re-released for DXP Platform.", PackageReference=C1206
  C37 C38 C65 C66 C77 C78: Revision="July-2002: Re-released for DXP Platform."
C46 C48: library part Cap, "Capacitor", LatestRevisionDate=17-Jul-2002, LatestRevisionNote="Re-released for DXP Platform.", Published=8-Jun-2000, Publisher="Altium Limited"
D2 D3: library part "D Schottky", "Schottky Diode", Code_JEDEC=DO-214-AA, LatestRevisionDate=17-Jul-2002, LatestRevisionNote="Re-released for DXP Platform.", PackageReference=SMB, Published=8-Jun-2000, Publisher="Altium Limited"
DS1: "Typical BLUE SiC LED", LatestRevisionDate=17-Dec-2003, LatestRevisionNote="PCB Footprint replaced.", Published=8-Jun-2000, Publisher="Altium Limited"
DS2 DS3 DS4 DS5: library part LED3, "Typical BLUE SiC LED", LatestRevisionDate=17-Dec-2003, LatestRevisionNote="PCB Footprint replaced.", Published=8-Jun-2000, Publisher="Altium Limited"
J1: library part "Header 18X2", "Header, 18-Pin, Dual row", LatestRevisionDate=17-Jul-2002, LatestRevisionNote="Re-released for DXP Platform.", Publisher="Altium Limited"
J3 J5: "USB 2.0, Right Angle, SMT, B Type, Receptacle, 5 Position, Black", PackageDocument=27-Jun-2003, ComponentLink1Description="Manufacturer Link", ComponentLink1URL=http://www.tycoelectronics.com/, ContactMaterial="Copper Alloy", ContactPlating="Gold (30)", DatasheetDocument=27-Jun-2003, DrillSize="Corresponds to nominal value.", HousingMaterial=Thermoplastic, PackageReference=440247, PanelGround=Without, PCB_Layout="Complies with manufacturer's recommendation.", Published=15-Jul-2004, Publisher="Altium Limited"
J4: library part "Header 9X2", "Header, 9-Pin, Dual row", LatestRevisionDate=17-Jul-2002, LatestRevisionNote="Re-released for DXP Platform.", Publisher="Altium Limited"
K1: library part KEYB
L2 R1 R2 R6 R32 R34 R57 R58 R64 R65 R66 R67 R68 R69 R70 R71 R72 R73 R85: library part Res1, "Resistor", Manufacturer="Generic Components", Class=Passive, Published=08/06/2000, Publisher="Altium Hobart Technology Centre", SubClass=Resistor
P1: library part "Header 5X2", "Header, 5-Pin, Dual row", LatestRevisionDate=17-Jul-2002, LatestRevisionNote="Re-released for DXP Platform.", Publisher="Altium Limited"
P4 P6: library part "Header 8", "Header, 8-Pin", LatestRevisionDate=17-Jul-2002, LatestRevisionNote="Re-released for DXP Platform.", Publisher="Altium Limited"
P5: library part "Header 8X2", "Header, 8-Pin, Dual row", LatestRevisionDate=17-Jul-2002, LatestRevisionNote="Re-released for DXP Platform.", Publisher="Altium Limited"
P7: library part "Header 6", "Header, 6-Pin", LatestRevisionDate=17-Jul-2002, LatestRevisionNote="Re-released for DXP Platform.", Publisher="Altium Limited"
R3 R4 R5 R8 R13 R14 R15 R16 R17 R18 R19 R21 R22 R23 R24 R25 R31 R35 R36 R38 R39 R40 R41 R48 R49 R50 R51 R52 R53 R54 R55 R56 R74 R75 R76 R77 R78 Rs1: library part Res3, "Resistor", LatestRevisionDate=4-Mar-2005, LatestRevisionNote="PCB Footprint replaced.", Published=8-Jun-2000, Publisher="Altium Limited"
R62 R63: library part R_Dup2
RN2 RN3 RN4 RN5 RN6 RN7 RN8 RN9 RN10 RN11 RN12: library part RN_Dup1
S1 S2: "Switch", LatestRevisionDate=17-Jul-2002, LatestRevisionNote="Re-released for DXP Platform.", Published=24-Mar-1999, Publisher="Altium Limited"
U8: library part LED_RGB
U11: library part F4x7
U21: library part 10CL010E144
U23 U24: library part SPX3819
Y1 Y2 Y3 Y4: library part "HEADER 2X2"

## Via types
v1: diameter 0.508, hole 0.254, Top Layer to Bottom Layer, 256 vias
v2: diameter 0.61, hole 0.305, Top Layer to Bottom Layer, 81 vias
v3: diameter 1, hole 1, Top Layer to Bottom Layer, 4 vias

## Nets (pads, with @x,y where several pads share a name; then routed paths per layer and width w, separated by ;. In a path a pad name is that pad's centre, name@x,y a point inside that pad or via, vN(x,y) a via of type N, cw(c..) or ccw(c..) an arc to the next point about the centre after c; other vN are vias at no path point)
\F\R\A\M\_\C\S\: U11.57 U12.1 | length 16.4
  Top Layer w0.152: U11.57@104.778,90.85 104.798,90.83 115.042,90.83 115.697,90.175 115.697,86.995 115.062,86.36 U12.1@113.979,86.36
ACCEL_DRDY: U11.90 U16.11 U21.50 | length 40
  Top Layer w0.152: U11.90@96.028,101.6 96.037,101.591 96.037,100.051 v2(96.266,99.822) ; U16.11@130.492,98.393 131.032,98.393 131.445,98.806 131.445,99.441 v1(130.683,100.203)
  ground_plane w0.152: v2(96.266,99.822) 113.792,99.822 114.656,98.958 129.184,98.958 130.429,100.203 v1(130.683,100.203)
ACCEL_MAG_CS: U11.9 U16.8 U21.32 | length 64
  Top Layer w0.152: U11.9@89.278,95.85 93.691,95.85 94.107,96.266 v1(102.87,96.266) ; v1(113.411,91.313) 113.589,91.135 124.792,91.135 128.805,87.122 131.699,87.122 132.842,88.265 132.842,94.996 130.845,96.993 U16.8@129.592,96.993
  ground_plane w0.152: v1(102.87,96.266) 103.505,96.901 107.743,96.901 109.013,98.171 v1(112.776,98.171)
  Bottom Layer w0.152: v1(112.776,98.171) 112.776,95.361 113.047,95.09 113.047,92.185 113.411,91.821 v1(113.411,91.313)
ASDO: P5.1 U20.5 U21.6 | length 14.8
  Bottom Layer w0.152: P5.1@125.793,79.883 125.793,80.081 127.207,81.495 ; U21.6@127.207,88.615 127.207,81.495 ; U20.5@131.445,84.515 128.425,81.495 127.207,81.495
AUX_OUT1: J2.46 U11.45 | length 46.6
  Top Layer w0.152: U11.45@100.528,86.1 100.584,86.044 v1(100.584,78.105)
  Bottom Layer w0.152: J2.46@64.008,81.343 68.008,77.343 99.822,77.343 v1(100.584,78.105)
AUX_OUT2: J2.43 U11.44 | length 44
  Top Layer w0.152: U11.44@100.028,86.1 100.028,79.931 v1(100.076,79.883)
  Bottom Layer w0.152: J2.43@64.008,83.883 65.469,83.883 69.469,79.883 v1(100.076,79.883)
AUX_OUT3: J2.40 U11.42 | length 42.6
  Top Layer w0.152: U11.42@99.028,86.1 99.06,86.068 v1(99.06,80.899)
  Bottom Layer w0.152: J2.40@64.008,86.423 69.38,81.051 98.908,81.051 v1(99.06,80.899)
AUX_OUT4: J2.37 U11.40 | length 41.7
  Top Layer w0.152: U11.40@98.028,86.1 98.044,86.084 v1(98.044,81.534)
  Bottom Layer w0.152: J2.37@64.008,88.963 71.437,81.534 v1(98.044,81.534)
AUX_OUT5: J2.34 U11.60 | length 55.6
  Top Layer w0.152: v2(103.632,92.329) 103.653,92.35 U11.60@104.778,92.35
  source w0.152: v2(103.632,92.329) 103.632,83.058 104.013,82.677 v1(104.013,82.042)
  Bottom Layer w0.152: J2.34@64.008,91.503 68.008,87.503 71.247,87.503 76.632,82.118 102.746,82.118 102.899,81.966 103.937,81.966 v1(104.013,82.042)
AUX_OUT6: J2.31 U11.61 | length 56.1
  Top Layer w0.152: v2(102.997,92.837) 103.022,92.862 104.766,92.862 U11.61@104.778,92.85
  source w0.152: v2(102.997,92.837) 102.997,82.55 v1(103.099,82.448)
  Bottom Layer w0.152: J2.31@64.008,94.043 68.008,90.043 70.612,90.043 78.207,82.448 v1(103.099,82.448)
BARO_CS: U11.88 U15.5 U21.49 | length 32.2
  Top Layer w0.152: U11.88@97.028,101.6 97.028,100.83 97.401,100.457 103.124,100.457 104.267,101.6 v1(115.062,101.6) ; v1(115.189,93.599) 115.824,92.964 118.491,92.964 U15.5@119.305,93.778
  Bottom Layer w0.152: v1(115.062,101.6) 115.062,93.726 v1(115.189,93.599)
BATT_CURRENT_SENS: C46.2 R38.2 U11.26 | length 26.5
  Top Layer w0.152: U11.26@91.028,86.1 91.028,86.964 v1(91.567,87.503)
  Bottom Layer w0.152: R38.2@82.28,106.172 82.28,105.271 C46.2@82.288,105.263 83.309,104.242 87.274,104.242 91.567,99.949 v1(91.567,87.503)
BATT_VOLTAGE_SENS: C48.2 R39.2 U11.25 | length 28.7
  Top Layer w0.152: U11.25@89.278,87.85 89.312,87.884 v1(90.678,87.884)
  Bottom Layer w0.152: R39.2@79.227,106.172 C48.2@79.227,105.263 80.579,103.911 87.174,103.911 91.161,99.924 91.161,88.875 90.678,88.392 v1(90.678,87.884)
BLUE: P7.3 RN10.2 RN10.3 RN10.4 RN11.4 RN11.8 RN12.8 | length 19.8
  Bottom Layer w0.152: RN11.8@139.534,88.087 139.757,88.087 140.542,87.302 140.542,86.068 140.923,85.687 RN11.4@141.392,85.687 142.066,85.687 142.485,86.106 RN12.8@143.383,86.106 145.022,87.745 RN10.4@145.241,87.745 ; P7.3@143.129,79.935 143.129,80.817 144.608,82.296 145.415,82.296 146.218,83.099 146.218,86.768 RN10.4@145.241,87.745 ; RN10.2@145.241,89.345 RN10.3@145.241,88.545 RN10.4@145.241,87.745
CAN1_RX: U11.81
CAN1_TX: U11.82
CLKOUT: R2.2 U21.71
CONF_DONE: R71.2 U21.92 | length 7.9
  Top Layer w0.152: v1(120.904,117.475) 120.904,114.173 121.793,113.284 v1(121.793,112.776)
  Bottom Layer w0.152: v1(120.904,117.475) R71.2@120.904,118.618 ; U21.92@121.707,111.115 121.707,112.69 v1(121.793,112.776)
DATA0: P5.5 U20.2 U21.13 U21.54 U25.24 | length 21.4
  Top Layer w0.152: v1(124.207,82.677) 128.143,82.677 129.54,81.28 v1(133.985,81.28)
  Bottom Layer w0.152: U21.13@123.707,88.615 123.707,85.538 124.207,85.038 v1(124.207,82.677) 124.207,81.991 123.902,81.686 123.902,79.992 P5.5@123.793,79.883 ; U20.2@133.985,79.315 v1(133.985,81.28)
DATA1: U21.55 U25.23
DATA2: U21.58 U25.22
DATA3: U21.59 U25.21
DATA4: U21.60 U25.20
DATA5: U21.65 U25.19
DATA6: U21.66 U25.18
DATA7: U21.67 U25.17
DCLK: P5.4 U20.6 U21.12 | length 24.2
  Bottom Layer w0.152: U21.12@124.181,88.589 124.181,89.891 124.841,90.551 130.302,90.551 132.461,88.392 132.461,87.249 132.207,86.995 132.207,85.929 132.715,85.421 U20.6@132.715,84.515 ; U21.12@124.207,88.615 124.207,85.469 124.69,84.987 124.69,81.969 124.414,81.694 124.414,80.073 124.333,79.992 124.207,79.992 124.207,79.969 P5.4@124.293,79.883
DIR: U21.70 U25.12
FMU_BOOT0: R36.2 U11.94 | length 3.1
  Top Layer w0.152: U11.94@94.028,101.6 94.028,102.791 v1(94.488,103.251)
  Bottom Layer w0.152: R36.2@94.485,104.529 94.485,103.254 v1(94.488,103.251)
FMU_CLK_24M: R32.2 U11.12 | length 2
  Top Layer w0.152: R32.2@87.241,94.361 89.267,94.361 U11.12@89.278,94.35
FMU_I2C1_SCL: J1.13 R3.2 U11.95 | length 5.9
  Top Layer w0.152: v2(79.502,114.046) J1.13@79.502,116.923 ; v1(93.472,103.251) 93.472,101.656 U11.95@93.528,101.6
  Bottom Layer w0.152: v1(93.472,103.251) 93.532,103.311 R3.2@93.532,104.529
FMU_I2C1_SDA: J1.14 R4.2 U11.96 | length 6.2
  Top Layer w0.152: J1.14@79.502,120.523 v2(79.502,123.571) ; v1(92.837,103.632) 92.837,102.795 93.028,102.604 U11.96@93.028,101.6
  Bottom Layer w0.152: R4.2@92.58,104.529 92.58,103.889 v1(92.837,103.632)
FMU_I2C2_SCL: R50.1 U9.3 U11.47 | length 12.7
  Top Layer w0.152: U11.47@101.528,86.1 101.528,79.447 102.997,77.978 103.986,77.978 R50.1@104.819,78.811 105.144,78.811 105.589,79.256 U9.3@106.426,79.256
FMU_I2C2_SDA: R51.1 U9.2 U11.48 | length 10.2
  Top Layer w0.152: U11.48@102.028,86.1 102.005,86.077 102.005,80.7 102.315,80.391 104.184,80.391 R51.1@104.811,79.764 106.418,79.764 U9.2@106.426,79.756
FMU_LED_AMBER: R21.1 U11.43 | length 11.7
  Top Layer w0.152: U11.43@99.528,86.1 99.543,86.085 99.543,78.003 100.584,76.962 R21.1@102.728,76.962
FMU_RESET: C44.2 S2.1 U11.14 | length 14.7
  Top Layer w0.152: v1(87.376,101.854) 87.376,102.803 C44.2@87.384,102.811 87.426,102.853 S2.1@87.426,106.172 ; v1(87.384,93.345) 89.273,93.345 U11.14@89.278,93.35
  Bottom Layer w0.152: v1(87.376,101.854) 87.376,93.353 v1(87.384,93.345)
FMU_SWCLK: P1.6 U11.76 | length 45.1
  Top Layer w0.152: P1.6@80.002,79.756 80.002,83.381 80.899,84.278 80.899,92.837 84.658,96.596 84.658,102.184 v1(84.963,102.489) ; U11.76@103.028,101.6 103.759,102.331 v1(103.759,102.743)
  ground_plane w0.152: v1(84.963,102.489) 103.505,102.489 v1(103.759,102.743)
FMU_SWDIO: P1.5 U11.72 | length 42.3
  Top Layer w0.152: P1.5@79.502,79.756 79.502,83.312 80.264,84.074 80.264,92.633 83.82,96.189 v1(83.82,99.06) ; v1(90.678,98.806) 91.134,98.35 U11.72@104.778,98.35
  ground_plane w0.152: v1(83.82,99.06) 90.043,99.06 90.297,98.806 v1(90.678,98.806)
FMU_SWO: U11.89
FMU_UART4_RX: J1.28 U11.24 | length 5.5
  Top Layer w0.152: J1.28@88.392,120.523 v2(88.392,123.571) ; v2(88.773,86.995) 88.265,87.503 88.265,88.107 88.508,88.35 U11.24@89.278,88.35
  source w0.152: v2(88.773,86.995) v2@88.798,87.02
FMU_UART4_TX: J1.27 U11.23 | length 28
  Top Layer w0.152: v2(87.611,87.884) 88.577,88.85 U11.23@89.278,88.85 ; v2(88.392,114.046) J1.27@88.392,116.923
  source w0.152: 86.639,109.826 88.494,107.971 88.494,89.002 87.611,88.119 v2(87.611,87.884)
FMU_UART7_RX: J1.32 U11.38 | length 33.3
  Top Layer w0.152: J1.32@90.932,120.523 v2(90.932,123.571) ; U11.38@97.028,86.1 97.028,87.194 98.099,88.265 v2(98.806,88.265)
  source w0.152: v2(98.806,88.265) 99.136,88.595 99.136,93.344 100.076,94.284 100.076,114.681
FMU_UART7_TX: J1.31 U11.39 | length 31.9
  Top Layer w0.152: v2(90.932,114.046) J1.31@90.932,116.923 ; U11.39@97.528,86.1 97.528,86.87 98.034,87.376 v2(98.806,87.376)
  source w0.152: v2(98.806,87.376) 99.568,88.138 99.568,93.345 100.482,94.259 100.482,113.436
FMU_UART8_RX: J1.30 U11.97 | length 12.7
  Top Layer w0.152: J1.30@89.662,120.523 v2(89.662,123.571) ; 91.694,110.871 91.694,106.807 92.329,106.172 92.329,102.743 92.528,102.544 U11.97@92.528,101.6
FMU_UART8_TX: J1.29 U11.98 | length 12.5
  Top Layer w0.152: v2(89.662,114.046) J1.29@89.662,116.923 ; 91.161,110.896 91.161,106.705 92.024,105.842 92.024,101.604 U11.98@92.028,101.6
FMU_USART2_CTS: J1.19 U11.84 | length 2.9
  Top Layer w0.152: v2(83.312,114.046) J1.19@83.312,116.923
FMU_USART2_RTS: J1.20 U11.85 | length 3
  Top Layer w0.152: J1.20@83.312,120.523 v2(83.312,123.571)
FMU_USART2_RX: J1.22 U11.87 | length 3
  Top Layer w0.152: J1.22@84.582,120.523 v2(84.582,123.571)
FMU_USART2_TX: J1.21 U11.86 | length 2.9
  Top Layer w0.152: v2(84.582,114.046) J1.21@84.582,116.923
FMU_USART3_CTS: J1.23 U11.58 | length 7.6
  Top Layer w0.152: v2(85.852,114.046) J1.23@85.852,116.923 ; v2(100.711,89.662) 101.611,89.662 102.418,90.469 102.444,90.469 103.326,91.35 U11.58@104.778,91.35
FMU_USART3_RTS: J1.24 U11.59 | length 7.7
  Top Layer w0.152: J1.24@85.852,120.523 v2(85.852,123.571) ; v2(100.711,90.424) 101.693,90.424 103.064,91.796 103.853,91.796 103.907,91.85 U11.59@104.778,91.85
FMU_USART3_RX: J1.26 U11.56 | length 7.8
  Top Layer w0.152: J1.26@87.122,120.523 v2(87.122,123.571) ; v2(100.711,88.662) 101.042,88.662 102.093,89.713 103.103,89.713 103.74,90.35 U11.56@104.778,90.35
FMU_USART3_TX: J1.25 U11.55 | length 7.8
  Top Layer w0.152: v2(87.122,114.046) J1.25@87.122,116.923 ; v2(100.711,87.9) 102.219,89.408 103.505,89.408 103.947,89.85 U11.55@104.778,89.85
FPGA_CLK_50M: R73.2 U21.23 | length 6.5
  Bottom Layer w0.152: U21.23@118.707,88.615 118.707,82.374 R73.2@118.916,82.165
FPGA_RESET: R63.1 U21.1 | length 11.4
  Top Layer w0.152: v1(137.516,94.132) R63.1@137.516,95.131
  source w0.152: v1(131.699,88.265) 137.516,94.082 v1(137.516,94.132)
  Bottom Layer w0.152: U21.1@129.707,88.615 130.057,88.265 v1(131.699,88.265)
FPGA_SDIO_CK: P6.5 U21.114 | length 10.9
  Top Layer w0.152: P6.5@131.221,109.864 134.103,109.864 135.128,108.839 v1(136.398,108.839)
  Bottom Layer w0.152: U21.114@132.207,106.115 133.674,106.115 v1(136.398,108.839)
FPGA_SDIO_CMD: P6.3 R76.1 U21.113 | length 13.9
  Top Layer w0.152: R76.1@129.278,112.103 131.182,112.103 P6.3@131.221,112.064 132.792,112.064 134.874,109.982 v1(136.398,109.982)
  Bottom Layer w0.152: U21.113@132.207,106.615 133.512,106.615 135.509,108.612 135.509,109.093 v1(136.398,109.982)
FPGA_SDIO_D0: P6.7 R75.1 U21.115 | length 12.2
  Top Layer w0.152: R75.1@129.278,107.607 131.164,107.607 P6.7@131.221,107.664 v1(136.398,107.664)
  Bottom Layer w0.152: U21.115@132.207,105.615 134.349,105.615 v1(136.398,107.664)
FPGA_SDIO_D1: P6.8 R74.1 U21.119 | length 13.9
  Top Layer w0.152: R74.1@129.278,106.553 131.21,106.553 P6.8@131.221,106.564 v1(136.398,106.564)
  Bottom Layer w0.152: U21.119@132.207,103.615 135.746,103.615 136.398,104.267 v1(136.398,106.564)
FPGA_SDIO_D2: P6.1 R78.1 U21.111 | length 15.1
  Top Layer w0.152: R78.1@129.278,114.3 131.185,114.3 P6.1@131.221,114.264 132.37,114.264 134.493,112.141 v1(136.398,112.141)
  Bottom Layer w0.152: U21.111@132.207,107.615 133.65,107.615 134.874,108.839 134.874,110.617 v1(136.398,112.141)
FPGA_SDIO_D3: P6.2 R77.1 U21.112 | length 14.5
  Top Layer w0.152: R77.1@129.278,113.157 131.214,113.157 P6.2@131.221,113.164 132.581,113.164 134.62,111.125 v1(136.398,111.125)
  Bottom Layer w0.152: U21.112@132.207,107.115 133.581,107.115 135.179,108.713 135.179,109.906 v1(136.398,111.125)
FPGA_VDD_1.2: C74.1 C76.2 U21.5 U21.29 U21.37 U21.45 U21.61 U21.78 U21.102 U21.109 U21.116 U21.134 U24.5 | length 66
  ground_plane w0.152: v1(105.537,106.934) v1(108.077,106.934) ; v1(114.681,108.458) 125.857,108.458 v1(126.619,109.22)
  source w0.152: v1(108.077,103.124) v1(108.077,106.934) ; v2(112.514,94.869) 112.624,94.759 112.624,91.796 v1(110.871,90.043) 114.808,86.106 v2(115.951,86.106) ; v1(126.619,109.22) 129.54,106.299 v1(129.54,105.664)
  Bottom Layer w0.152: U24.5@104.521,105.995 104.317,105.995 105.256,106.934 v1(105.537,106.934) ; v1(108.077,103.124) 108.086,103.115 U21.61@109.707,103.115 ; U21.37@109.707,91.115 110.307,91.115 110.871,90.551 v1(110.871,90.043) ; U21.45@109.707,95.115 112.133,95.115 112.379,94.869 v2(112.514,94.869) ; v1(114.681,108.458) 114.707,108.484 U21.78@114.707,111.115 ; U21.29@115.707,88.615 115.707,86.35 v2(115.951,86.106) ; v1(126.619,109.22) 126.707,109.308 U21.102@126.707,111.115 ; U21.5@127.707,88.615 127.707,86.804 C76.2@127.897,86.614 127.897,85.606 v2(127.889,85.598) ; U21.134@132.207,96.115 135.787,96.115 C74.1@136.171,95.731 ; U21.116@132.207,105.115 130.089,105.115 v1(129.54,105.664) 129.54,107.083 131.072,108.615 U21.109@132.207,108.615
FPGA_VDD_2.5: C71.1 C73.2 U21.35 U21.107 U23.5 | length 42.5
  ground_plane w0.152: v1(117.729,113.919) v1(133.985,113.919)
  source w0.152: v1(117.729,113.919) v1(117.729,119.507)
  Bottom Layer w0.152: C73.2@109.225,119.967 109.225,118.597 U23.5@109.281,118.541 110.683,118.541 C71.1@110.744,118.602 111.649,119.507 v1(117.729,119.507) ; v2(112.141,86.36) 112.707,86.926 U21.35@112.707,88.615 ; U21.107@129.207,111.115 129.207,109.934 129.413,109.728 129.921,109.728 133.985,113.792 v1(133.985,113.919)
FRAM_MISO: U11.53 U12.2 | length 10.3
  Top Layer w0.152: U11.53@104.778,88.85 106.249,88.85 106.934,89.535 110.236,89.535 112.141,87.63 U12.2@113.979,87.63
FRAM_MOSI: U11.54 U12.5 | length 4.3
  Top Layer w0.152: U11.54@104.778,89.35 106.114,89.35 106.934,90.17 U12.5@108.779,90.17
FRAM_SCK: U11.52 U12.6 | length 4.2
  Top Layer w0.152: U11.52@104.778,88.35 106.384,88.35 106.934,88.9 U12.6@108.779,88.9